# Altium PCB PCB_Ticketing_Slave_SSOP.PcbDoc
Units mm, origin at the board's own origin, x right, y up, seen from the top; angles counter-clockwise.
Board outline 80.7 x 51.5 mm, 2 copper layers (Top Layer, Bottom Layer), stack 1.586 mm thick; 49 components, 36 nets, 189 pads, 53 vias.
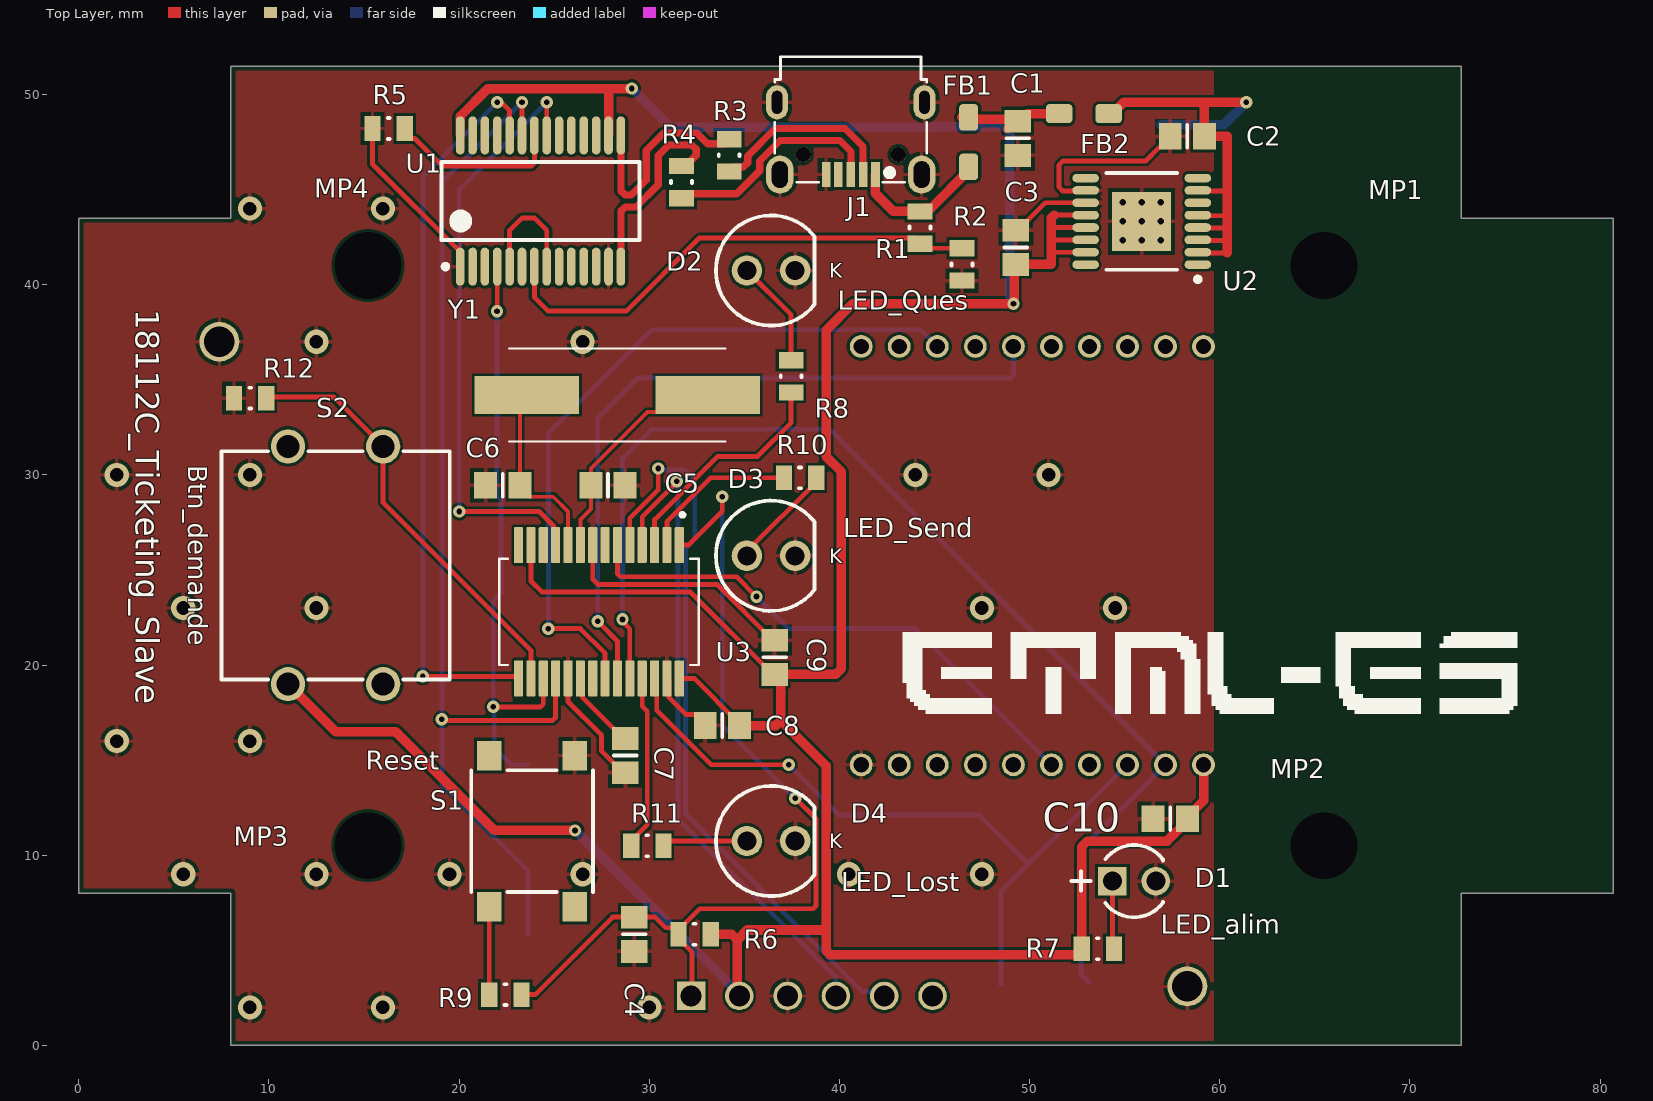
[diagram p0: Top Layer view]
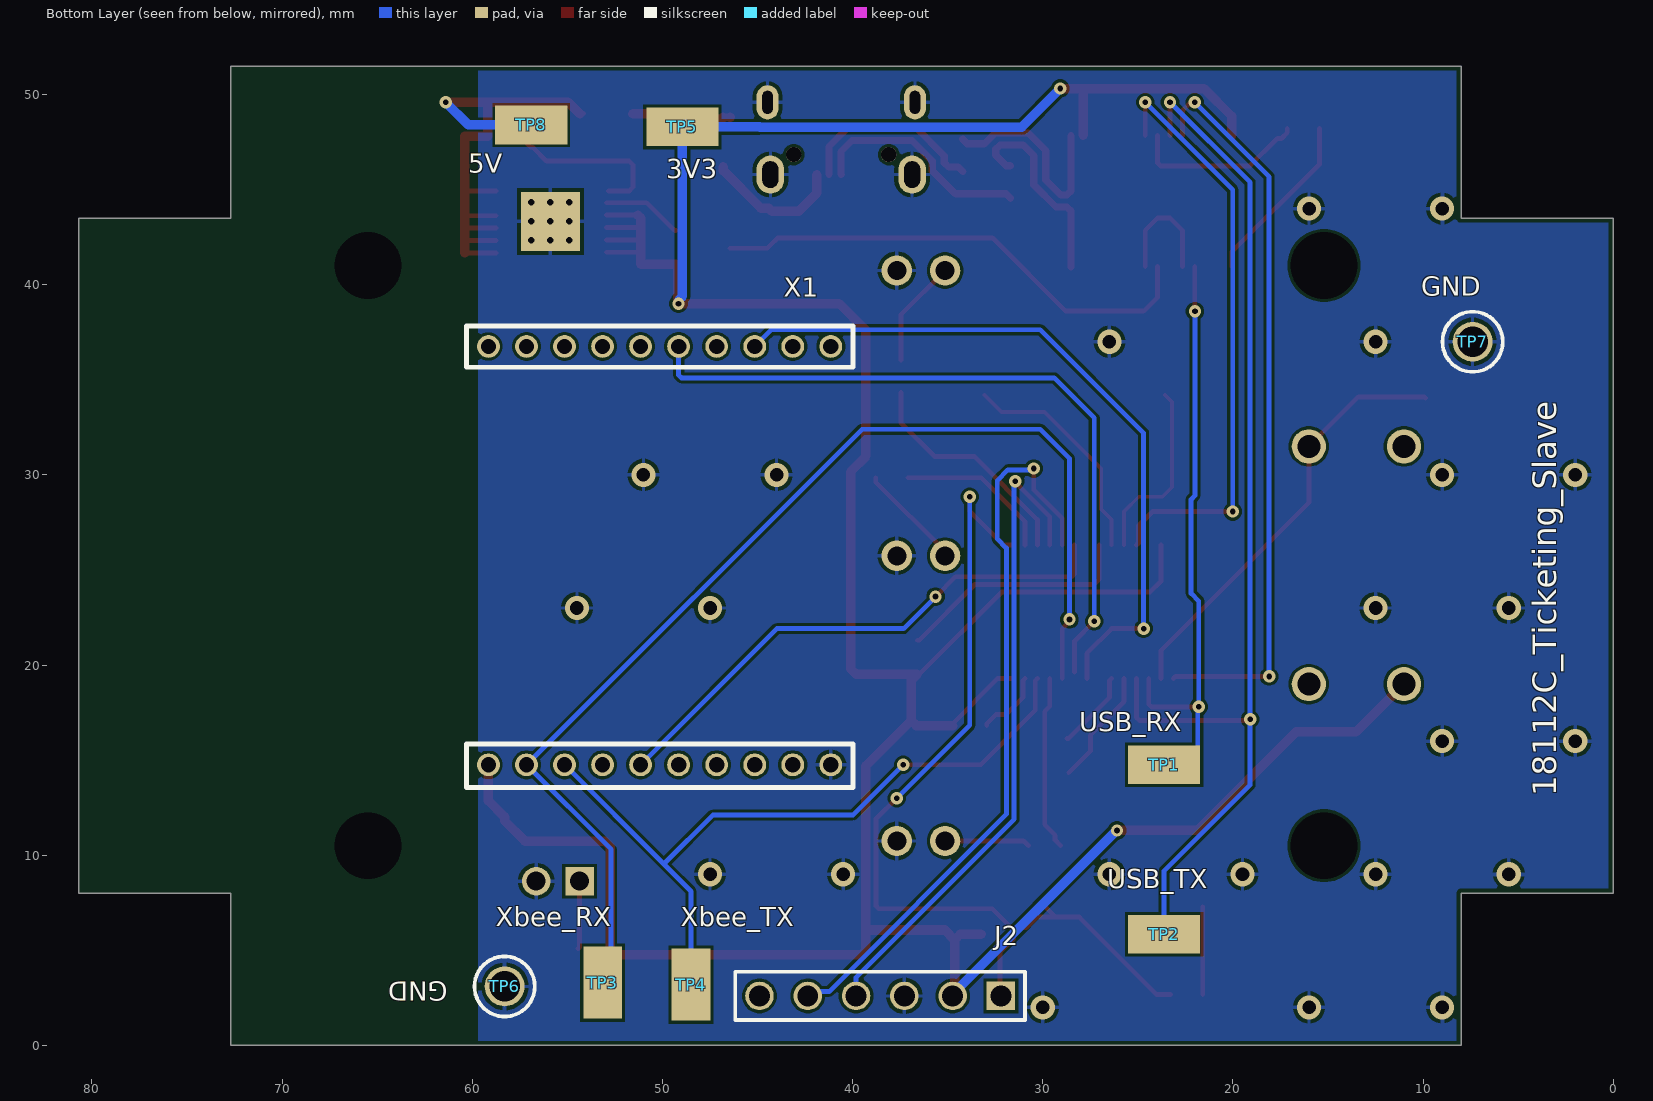
[diagram p1: Bottom Layer view, seen from below]

## Layer stack, top to bottom
Top Solder: solder mask 0.0102, Solder Resist, Dk 3.5
Top Layer: signal copper 0.018
Dielectric1: core 1.55, FR-4, Dk 4.8
Bottom Layer: signal copper 0.018
Bottom Solder: solder mask 0.0102, Solder Resist, Dk 3.5

## Board outline
0,8 0,43.5 8,43.5 8,51.5 72.7,51.5 72.7,43.5 80.7,43.5 80.7,8 72.7,8 72.7,0 8,0 8,8

## Design rules (kind name [scope] priority, off if disabled: settings)
BoardOutlineClearance [All] p1: gap=0.25 ignorepadtopadclearanceinfootprint=FALSE except(0: Arc-SplitContinuation Track-SplitContinuation SMDPad-SplitContinuation THPad-SplitContinuation Via-SplitContinuation Fill-SplitContinuation Poly-SplitContinuation Region-SplitContinuation Text-SplitContinuation)
Clearance Clearance-xPP-xTP-xTT [All] p1: gap=0.15 ignorepadtopadclearanceinfootprint=FALSE except(0: Arc-Hole Track-Hole SMDPad-Hole THPad-Hole Via-Hole Fill-Hole Poly-Hole Region-Hole Text-Hole)
ComponentClearance [All] p1: gap=0.25 collisioncheckmode=3 verticalgap=0.25 showdistances=FALSE
DiffPairsRouting [All] p1: maxlimit=0.25 minlimit=0.25 mostfreqgap=0.25 toplayer_minwidth=0.381 toplayer_maxwidth=0.381 toplayer_prefwidth=0.381 bottomlayer_minwidth=0.381 bottomlayer_maxwidth=0.381 bottomlayer_prefwidth=0.381 maxuncoupledlength=12.5
Height [All] p1: minheight=0 maxheight=25 prefheight=12.5
HoleSize HoleSize-PTH [All] p1: absolutevalues=TRUE maxlimit=10 minlimit=0.25 maxpercent=80.000 minpercent=20.000
HoleToHoleClearance [All] p1: gap=0.35 allowstackedmicrovias=TRUE
MinimumAnnularRing "Minimum IAR  >0.45mm" [((ObjectKind = 'Pad') OR (ObjectKind = 'Via')) And (Layer = 'MultiLayer') And (HoleDiameter > AsMM(0.45))] p1: minimumring=0.175 // minimum inner annular ring for pads > 0.45mm finished hole size
MinimumAnnularRing "Minimum IAR <=0.45mm" [((ObjectKind = 'Pad') OR (ObjectKind = 'Via')) And (Layer = 'MultiLayer') And (HoleDiameter <= AsMM(0.45))] p2: minimumring=0.175 // minimum inner annular ring for pads <= 0.45mm finished hole size
MinimumSolderMaskSliver [All] p1: minsoldermaskwidth=0.08
PasteMaskExpansion [All] p1: expansion=-0.025
PlaneClearance PlaneClearance-IPI [All] p1: clearance=0.25
PlaneConnect [All] p1: planeconnectstyle=Relief reliefexpansion=0.175 reliefentries=4 reliefconductorwidth=0.2 reliefairgap=0.2
PolygonConnect PolygonConnect-xTW [All] p1: connectstyle=Relief reliefconductorwidth=0.2 reliefentries=4 polygonreliefangle="90 Angle" airgapwidth=0.2
RoutingCorners [All] p1: cornerstyle=45-Degree minsetback=2.5 maxsetback=2.5
RoutingVias RoutingViasES [All] p1: holewidth=0.3 width=0.65 viastyle="Through Hole" minholewidth=0.25 minwidth=0.61 maxholewidth=0.45 maxwidth=0.8 // finishet hole size <= 0.45mm
SilkToSilkClearance [All] p1: silktosilkclearance=0.2
SilkToSolderMaskClearance SilkscreenOverComponentPads [IsPad] p1: minsilkscreentomaskgap=0.2 clearancetoexposedcopper=TRUE
SolderMaskExpansion [All] p1: expansion=0 istentingtop=FALSE
UnRoutedNet [All] p1: checkbadconnections=TRUE
Width "Width Power" [InNetClass('POWER')] p1: maxlimit=0.5 minlimit=0.254 preferedwidth=0.5
Width Width-xTW [All] p2: maxlimit=1.5 minlimit=0.15 preferedwidth=0.254
17 further rules are at their usual default settings.

## Classes and differential pairs
net class POWER: 3V3 5V GND NetC1_1 NetR1_2 NetU2_6 VBUS
component class Designator: C1 C2 C3 FB1 FB2 J1 R1 R2 R3 R4 R5 TP1 TP2 TP5 TP6 TP7 TP8 U1 U2
differential pair USB_D: +USB_D_P -USB_D_N
differential pair U_D: +U_D_P -U_D_N

## Components (designator, comment, footprint, x,y, rotation, side; value= is the part's Value field where it differs from the comment)
C1 "680nF" 6-0805_N 49.384,47.7 r270 top
C2 "10uF" 6-0805_N 58.3,47.8 r180 top
C3 "10uF" 6-0805_N 49.284,41.963 r270 top
C4 "120nF" 6-0805_N 29.21,5.842 r90 top
C5 "22pF" 6-0805_N 27.835,29.449 r180 top
C6 "22pF" 6-0805_N 22.3,29.449 r0 top
C7 "10uF" 6-0805_N 28.735,15.24 r90 top
C8 "100nF" 6-0805_N 33.845,16.82 r0 top
C9 "100nF" 6-0805_N 36.6,20.407 r270 top
C10 "100nF" 6-0805_N 57.4,11.911 r0 top
D1 "WP424IDT" LED-2P-2.28-3MM 55.499,8.636 r0 top locked
D2 "WP7113LGD" "Type 5mm" 36.41,40.746 r0 top locked
D3 "WP7113ND" "Type 5mm" 36.41,25.746 r0 top locked
D4 "WP7113LID" "Type 5mm" 36.41,10.746 r0 top locked
FB1 "600Ohm, 2A" "WE-CBF_0805_High Current" 46.8,47.5 r90 top
FB2 "600Ohm, 2A" "WE-CBF_0805_High Current" 52.859,49 r0 top
J1 "629105150521" 629105150521 40.6,48.691 r180 top locked
J2 "76384-406LF" 76384-406LF 32.2,2.6 r0 bottom
MP1 "M3" 9774010151 65.485,41.01 r0 top locked
MP2 "M3" 9774010151 65.485,10.5 r0 top locked
MP3 "M3" 9774010151 15.215,10.5 r0 top locked
MP4 "M3" 9774010151 15.215,41.01 r0 top locked
R1 "10k" RESC0805(2012)_L 44.244,43.007 r270 top
R2 "20k" RESC0805(2012)_L 46.45,41.063 r270 top
R3 "24R" RESC0805(2012)_L 34.207,46.8 r90 top
R4 "24R" RESC0805(2012)_L 31.7,45.4 r90 top
R5 "1k" RESC0805(2012)_L 16.3,48.212 r180 top
R6 "47k" RESC0805(2012)_L 32.385,5.842 r180 top
R7 "68" RESC0805(2012)_L 53.594,5.08 r180 top
R8 "750" RESC0805(2012)_L 37.465,35.179 r270 top
R9 "120" RESC0805(2012)_L 22.44,2.667 r0 top value=10k
R10 "68" RESC0805(2012)_L 37.934,29.845 r180 top value=680
R11 "820" RESC0805(2012)_L 29.903,10.5 r180 top value=680
R12 "10k" RESC0805(2012)_L 9.017,34.036 r180 top
S1 "430182050816" 430182050816 23.84,11.265 r270 top locked
S2 "430466073726" 4304x60737x6_12x12x7.3 13.51,25.246 r90 top locked
TP1 "" KSTN-5019_V 23.622,14.755 r180 bottom
TP2 "" KSTN-5019_V 23.622,5.842 r180 bottom
TP3 "" KSTN-5019_V 53.15,3.302 r270 bottom value=Xbee_RX
TP4 "" KSTN-5019_V 48.5,3.2 r270 bottom value=Xbee_TX
TP5 "" KSTN-5019_V 48.952,48.3 r0 bottom
TP6 "" KSTN-5011_V 58.3,3.1 r270 bottom
TP7 "" KSTN-5011_V 7.4,37 r0 bottom
TP8 "" KSTN-5019_V 56.9,48.4 r0 bottom
U1 "CY7C64225-28PVXC" CYP-PVX28_N 24.287,44.4 r90 top
U2 "MAX1793EUE33+" TSOP65P640X110_HS-17N 55.9,43.332 r180 top
U3 "PIC32MX130F064B-I/ML" SOP65P780X200-28N 27.357,22.8 r270 top locked
X1 "Header 2x10" ZB-SB 50.15,25.755 r90 bottom locked
Y1 "LFXTAL003151" LFXTAL003151REEL 28.321,34.2 r180 top

## Footprints (in the part's own frame and the unit in brackets; to place one, negate y for a bottom-side part, rotate by r counter-clockwise, add the part's x,y. Pads: shape width x height; smd on the part's side, far side on the other; paste and mask are expansions set on the pad)
6-0805_N [mm] "Chip Resistor, Body 2.0x1.2mm, IPC Medium Density"
  rect 1.2x1.4 smd: 1(-0.9,0) 2(0.9,0)
  silkscreen extent 0,-0.6 0,0.6, body extent -1.07,-0.7 1.07,0.7, height 0.7
4304x60737x6_12x12x7.3 [mm] "12x12mm washable Tact Switch, THT version"
  round 1.8 hole 1.2: 1(-6.25,2.5) 2(6.25,2.5) 3(-6.25,-2.5) 4(6.25,-2.5)
  silkscreen extent -6,-6 6,6, body extent -6.99,-6 6.99,6, height 7.35
76384-406LF [mm] "Connector; Header; 6 Position"
  rect 1.5x1.5 hole 1.1: 1(0,0)
  round 1.5 hole 1.1: 2(2.54,0) 3(5.08,0) 4(7.62,0) 5(10.16,0) 6(12.7,0)
  silkscreen extent -1.27,-1.27 13.97,1.27, body extent -0.72,-2.58 13.52,2.67, height 8.84
9774010151 [mm] "M2.5 Thread Internal, Length 1mm"
  round 0 hole 3.51 unplated paste-403.566: 1(0,0)
430182050816 [mm] "SMD Tact Switch, body 6x6mm"
  rect 1.55x1.3 smd: 1(-3.975,2.25) 2(-3.975,-2.25) 3(3.975,2.25) 4(3.975,-2.25)
  silkscreen extent -3.2,-3.2 3.2,3.2, body extent -4.5,-3.1 4.5,3.1, height 5.03
629105150521 [mm] "Micro USB 2.0 SMT Type B Horizontal 5 Contacts High Current"
  rect 0.45x1.3 smd: 1(-1.3,2.9) 2(-0.65,2.9) 3(0,2.9) 4(0.65,2.9) 5(1.3,2.9)
  oval 1.15x1.8 hole 0.55 slot 1.2 at 90 deg: Shell(-3.875,-0.9) Shell(3.875,-0.9)
  oval 1.45x2 hole 0.85 slot 1.4 at 90 deg: Shell(-3.725,2.9) Shell(3.725,2.9)
  round 0.8 hole 0.8 unplated: ""(-2.5,1.85) ""(2.5,1.85)
  silkscreen extent -4,-3.3 4,3.3, body extent -4,-3.3 4,3.3, height 2.71
CYP-PVX28_N [mm] "SOP, 28-Leads, Body 10.2x5.3mm, Pitch 0.65mm, IPC Medium Density"
  oval 2x0.45 smd: 1(-3.45,4.225) 2(-3.45,3.575) 3(-3.45,2.925) 4(-3.45,2.275) 5(-3.45,1.625) 6(-3.45,0.975) 7(-3.45,0.325) 8(-3.45,-0.325) 9(-3.45,-0.975) 10(-3.45,-1.625) 11(-3.45,-2.275) 12(-3.45,-2.925) 13(-3.45,-3.575) 14(-3.45,-4.225) 15(3.45,-4.225) 16(3.45,-3.575) 17(3.45,-2.925) 18(3.45,-2.275) 19(3.45,-1.625) 20(3.45,-0.975) 21(3.45,-0.325) 22(3.45,0.325) 23(3.45,0.975) 24(3.45,1.625) 25(3.45,2.275) 26(3.45,2.925) 27(3.45,3.575) 28(3.45,4.225)
  silkscreen extent -3.57,-5.2 2.05,5.2, body extent -3,-4.95 3,4.95, height 1.75
KSTN-5011_V [mm] "Test Point, Dia 3.17mm"
  round 2.1 hole 1.6: 1(0,0)
  silkscreen extent -1.58,-1.59 1.58,1.59, body extent -1.59,-1.59 1.59,1.59, height 8.13
KSTN-5019_V [mm] "Test Point, 1-Leads, Body 3.81x2.03mm"
  rect 3.8x2.03 smd: 1(0,0)
  body extent -1.91,-1.02 1.9,1.02, height 2.29
LED-2P-2.28-3MM [mm] "LED, 2-Leads, Dia 3mm, Pitch 2.28mm"
  rect 1.5x1.5 hole 1: 1(-1.14,0)
  round 1.5 hole 1: 2(1.14,0)
  silkscreen extent -3.29,-1.9 1.52,1.9, body extent -1.9,-1.91 1.52,1.91, height 5.3
LFXTAL003151REEL [mm]
  rect 5.5x2 smd: 1(-4.75,0) 2(4.75,0)
  silkscreen extent -5.7,-2.45 5.7,2.45, body extent -5.81,-2.35 5.8,2.35, height 4.2
RESC0805(2012)_L [mm] "Chip Resistor, Body 2.0x1.3mm, IPC High Density"
  rect 0.85x1.3 smd: 1(-0.85,0) 2(0.85,0)
  silkscreen extent -0.05,-0.55 0.05,0.55, body extent -1.1,-0.67 1.1,0.68, height 0.7
SOP65P780X200-28N [mm]
  rrect25% 1.9x0.48 smd: 1(-3.505,4.225) 2(-3.505,3.575) 3(-3.505,2.925) 4(-3.505,2.275) 5(-3.505,1.625) 6(-3.505,0.975) 7(-3.505,0.325) 8(-3.505,-0.325) 9(-3.505,-0.975) 10(-3.505,-1.625) 11(-3.505,-2.275) 12(-3.505,-2.925) 13(-3.505,-3.575) 14(-3.505,-4.225) 15(3.505,-4.225) 16(3.505,-3.575) 17(3.505,-2.925) 18(3.505,-2.275) 19(3.505,-1.625) 20(3.505,-0.975) 21(3.505,-0.325) 22(3.505,0.325) 23(3.505,0.975) 24(3.505,1.625) 25(3.505,2.275) 26(3.505,2.925) 27(3.505,3.575) 28(3.505,4.225)
  silkscreen extent -5.19,-5.25 2.8,5.25
TSOP65P640X110_HS-17N [mm] "TSOP, 16-Leads, Body 5.00x4.40mm, Pitch 0.65mm, Thermal Pad 3.10x3.10mm, IPC Medium Density"
  oval 1.4x0.45 smd: 1(-2.95,2.275) 2(-2.95,1.625) 3(-2.95,0.975) 4(-2.95,0.325) 5(-2.95,-0.325) 6(-2.95,-0.975) 7(-2.95,-1.625) 8(-2.95,-2.275) 9(2.95,-2.275) 10(2.95,-1.625) 11(2.95,-0.975) 12(2.95,-0.325) 13(2.95,0.325) 14(2.95,0.975) 15(2.95,1.625) 16(2.95,2.275)
  rect 3.1x3.1 smd far side: 17(0,0)
  rect 3.1x3.1 smd: 17(0,0)
  silkscreen extent -3.08,-2.55 1.85,3.17, body extent -3.19,-2.55 3.19,2.55, height 1.1
"Type 5mm" [mm] "THT, LED-5mm, 2pin- Body 5.8mm"
  round 1.6 hole 1: 1(1.27,0) 2(-1.27,0)
  silkscreen extent -2.9,-2.9 2.29,2.9, body extent -2.9,-2.9 2.5,2.9, height 11.7
"WE-CBF_0805_High Current" [mm]
  rrect40% 1.4x1 smd: 1(-1.3,0) 2(1.3,0)
  body extent -1,-0.6 1,0.6, height 0.9
ZB-SB [mm] "Header"
  round 1.2 hole 0.8: 1(-11,9) 2(-11,7) 3(-11,5) 4(-11,3) 5(-11,1) 6(-11,-1) 7(-11,-3) 8(-11,-5) 9(-11,-7) 10(-11,-9) 11(11,9) 12(11,7) 13(11,5) 14(11,3) 15(11,1) 16(11,-1) 17(11,-3) 18(11,-5) 19(11,-7) 20(11,-9)
  silkscreen extent -12.19,-10.16 12.06,10.16, body extent -12.55,-10.34 12.45,30.66, height 7.5

## Part data
C1: library part 885012207098, "WCAP-CSGP General Purpose Ceramic Capacitors, size 0805, 100nF, +/-10%, 50VDC", Supplier Part Number=732-7663-1-ND, Capacitance=680nF, Supplier=Digi-Key, Supplier Part Number 1=732-7663-1-ND, Supplier unit price=0.13, Technical Reference=X7R0805104K050DFCT10000
C2 C3 C7: library part Cap, "Capacitor", Supplier Part Number=1276-1298-1-ND, Supplier=Digi-Key, Supplier unit price=0.1
  C2 C3: Capacitance=10uF, LatestRevisionDate=17-Jul-2002, LatestRevisionNote="Re-released for DXP Platform.", PackageDescription="Radial Cap, Thru-Hole; 2 Leads; 0.3 in Pin Spacing", PackageReference=RAD-0.3, Published=8-Jun-2000, Publisher="Altium Limited"
C4: library part Cap, "Capacitor", Supplier Part Number=311-4323-1-ND, Supplier=Digi-Key, Supplier unit price=0.18
C5 C6: library part CMP-2007-03167-1, "VJ0805Y104KNAAT", Supplier Part Number=399-C0805C220J5GAC7800CT-ND, Supplier=Digi-Key, Supplier unit price=0.1
C8 C9 C10: library part Cap, "Capacitor", Supplier Part Number=399-C0805C104M5RAC7800CT-ND, Supplier=Digi-Key, Supplier unit price=0.1
D1: library part LED, "LED", Color=Red, Supplier Part Number=754-1305-ND, Supplier=Digi-Key, Supplier unit price=0.4
D2: library part LED, "LED", Color=Green, Supplier Part Number=754-1265-ND, Supplier=Digi-Key, Supplier unit price=0.33
D3: library part LED, "LED", Color=Orange, Supplier Part Number=754-1896-ND, Supplier=Digi-Key, Supplier unit price=0.3
D4: library part LED, "LED", Color=Red, Supplier Part Number=754-1266-ND, Supplier=Digi-Key, Supplier unit price=0.33
FB1 FB2: library part 742792040, "WE-CBF SMT EMI Suppression Ferrite Bead, size 0805, 600Ohm, 2A", DC Resistance max.=0.15Ohm, Operating Temperature="-55 to +125degC", Rated Current=2A, Supplier Part Number=732-1620-1-ND, ComponentLink1Description=Manufacturer, ComponentLink1URL=http://www.we-online.de, ComponentLink2Description=Datasheet, ComponentLink2URL=https://katalog.we-online.com/pbs/datasheet/742792040.pdf, Impedance max.=700Ohm, Impedance@100 MHz=600Ohm, Mounting Technology=SMT, Packaging="Tape and Reel", Part Number=742792040, Published Date="March 2019", Publisher="Wurth Elektronik", Size=0805, Supplier=Digi-Key, Supplier Part Number 1=732-1620-1-ND, Supplier unit price=0.22, Type="High Current"
J1: "Micro USB 2.0 SMT Type B Horizontal 5 Contacts High Current WR-COM", Part Number=732-5960-1-ND, ComponentLink1Description=Manufacturer, ComponentLink1URL=http://www.we-online.de, ComponentLink2Description=Datasheet, ComponentLink2URL=http://katalog.we-online.de/em/datasheet/629105150521.pdf, Construction=SMT, Gender=Receptacle, Interface Type="Type B", Published Date="April 2017", Publisher="Wurth Elektronik", Sub-Family="Micro USB 2.0", Supplier=Digi-key, Supplier Part Number=732-5960-1-ND, Supplier unit price=2.12, Type=Horizontal
J2: library part "Header 6", "Header, 6-Pin", Supplier Part Number 1=609-1321-ND, LatestRevisionDate=17-Jul-2002, LatestRevisionNote="Re-released for DXP Platform.", Publisher="Altium Limited", Supplier 1=Digi-Key, Supplier unit price=0.66
MP1 MP2 MP3 MP4: library part 9774010151, "WA-SMSI SMT Steel Spacer, M2.5 Thread Internal, Length 1mm", Supplier=Digi-Key
R1: library part CMP-1013-00122-1, "100K 0.125W 5% 0805 (2012 Metric)  SMD", Case-EIA=0805, Case-Metric=2012, Power="0.125 W", Supplier Part Number=311-10KLGCT-ND, Tolerance="5 %", Supplier=Digi-Key, Supplier unit price=0.1, Technology=SMT
R2: library part CMP-1013-00122-1, "100K 0.125W 5% 0805 (2012 Metric)  SMD", Case-EIA=0805, Case-Metric=2012, Power="0.125 W", Supplier Part Number=RNCP0805FTD20K0CT-ND, Tolerance="5 %", Supplier=Digi-Key, Supplier unit price=0.1, Technology=SMT
R3 R4: library part CMP-1013-00122-1, "100K 0.125W 5% 0805 (2012 Metric)  SMD", Case-EIA=0805, Case-Metric=2012, Power="0.125 W", Supplier Part Number=311-24.0CRCT-ND, Tolerance="5 %", Supplier=Digi-Key, Supplier unit price=0.1, Technology=SMT
R5: library part CMP-1013-00122-1, "100K 0.125W 5% 0805 (2012 Metric)  SMD", Case-EIA=0805, Case-Metric=2012, Power="0.125 W", Supplier Part Number=RNCP0805FTD1K00CT-ND, Tolerance="5 %", Supplier=Digi-Key, Supplier unit price=0.1, Technology=SMT
R6: library part CMP-1013-00122-1, "100K 0.125W 5% 0805 (2012 Metric)  SMD", Supplier Part Number=A130144CT-ND, Supplier=Digi-Key, Supplier unit price=0.1
R7 R10: library part CMP-1013-00122-1, "100K 0.125W 5% 0805 (2012 Metric)  SMD", Supplier Part Number=RMCF0805JT68R0CT-ND, Supplier=Digi-Key, Supplier unit price=0.1
R8: library part CMP-1013-00122-1, "100K 0.125W 5% 0805 (2012 Metric)  SMD", Supplier Part Number=A126386CT-ND, Supplier=Digi-Key, Supplier unit price=0.1
R9: library part CMP-1013-00122-1, "100K 0.125W 5% 0805 (2012 Metric)  SMD", Supplier Part Number=A129738CT-ND, Supplier=Digi-Key, Supplier unit price=0.1
R11: library part CMP-1013-00122-1, "100K 0.125W 5% 0805 (2012 Metric)  SMD", Supplier Part Number=A129748CT-ND, Supplier=Digi-Key, Supplier unit price=0.1
R12: library part CMP-1013-00122-1, "100K 0.125W 5% 0805 (2012 Metric)  SMD", Supplier Part Number=311-10KLGCT-ND, Supplier=Digi-Key, Supplier unit price=0.1
S1: "6x6mm SMD Tact Switch WS-TASV, height 5 mm, 160 gf", Supplier Part Number=732-7005-1-ND, Supplier=Digi-Key, Supplier unit price=0.51
S2: "WS-TATV 12x12mm washable Tact Switch, THT version", Supplier Part Number=430466073726-ND, Supplier=Digi-Key, Supplier unit price=0.56
TP1 TP2 TP5 TP8: library part CMP-1672-00008-1, "Test Point, 1 Position SMD, RoHS, Tape and Reel", Package Quantity=1000, Supplier Part Number=36-5019CT-ND, ComponentLink1Description="Manufacturer URL", ComponentLink1URL=http://www.keyelco.com/, ComponentLink2Description=Datasheet, ComponentLink2URL=http://www.keyelco.com/product-pdf.cfm?p=1357, Contact Plating=Silver, DatasheetVersion=03/2014, Mount="Surface Mount", Mounting Technology="Surface Mount", PackageDescription="1-Pin Surface Mount Device, Body 3.81 x 2.03 mm", PackageReference=5019, Packaging="Tape and Reel", Pins=1, RoHSCompliant=True, Supplier=Digi-Key, Supplier unit price=0.33
TP3 TP4: library part CMP-1672-00008-1, "Test Point, 1 Position SMD, RoHS, Tape and Reel", Supplier Part Number=36-5019CT-ND, Supplier=Digi-Key, Supplier unit price=0.33
TP6 TP7: library part CMP-1672-00003-4, "Test Point, Black, Through Hole, RoHS, Bulk,5011", Colour=Black, Manufacturer=Keystone, Package Quantity=100, ComponentLink1Description="Manufacturer URL", ComponentLink1URL=http://www.keyelco.com/, ComponentLink2Description=Datasheet, ComponentLink2URL=http://www.keyelco.com/product-pdf.cfm?p=1320, Contact Material=Bronze, Contact Plating=Silver, DatasheetVersion="Rev. F, 12/2013", Height="8.12 mm", Mount="Through Hole", Mounting Technology="Through Hole", PackageDescription="1-Pin Through Hole Device, Dia 3.17 mm", PackageReference=5011, Packaging=Bulk, Pins=1, REACH SVHC="No SVHC", RoHSCompliant=true
U1: library part CMP-0967-00143-1, "USB-to-UART Bridge Controller, 3 to 5.25 V, 0 to 70 degC, 28-Pin SSOP (PVX28), Tube", Manufacturer=Cypress, Max. Operating Temp. (degreesC)=70, Max. Operating Voltage (V)=5.25, Min. Operating Temp. (degreesC)=0, Min. Operating Voltage (V)=3, Part Number=428-3158-ND, ComponentLink1Description="Manufacturer URL", ComponentLink1URL=http://www.cypress.com/, ComponentLink2Description=Datasheet, ComponentLink2URL=http://www.cypress.com/?docID=48153, ComponentLink3Description="Package Specification", ComponentLink3URL=http://www.cypress.com/?docID=1371, DatasheetVersion="Rev. *D", Manufacturer Part Number=CY7C64225-28PVXC, Memory Architecture=Flash, Mounting Technology="Surface Mount", PackageDescription="28-Pin Super Small Outline Package, Body 10.2 x 5.3 mm, Pitch 0.65 mm", PackageReference=PVX28, PackageVersion="Rev. *C, 10/2001", Packing=Tube, PartNumber=CY7C64225-28PVXC, RoHS=Pb-Free, Supplier=Digi-key, Supplier Part Number=428-3158-ND, Supplier unit price=3.83
U2: library part MAX1793, Supplier Part Number=MAX1793EUE33+-ND, Supplier=Digi-Key, Supplier unit price=3.92
U3: library part CMP-0048-00437-1, "32-bit Microcontroller with Audio and Graphics Interface, USB and Advanced Analog, 40 MHz, 21 I/O, PMP, -40 to 85 degC, 28-pin QFN (ML28), Tube", Supplier=Digi-Key, Supplier Part Number=PIC32MX130F064B-I/ML, Supplier unit price=3.61
X1: library part "HDR ZB-SB 2x10_1", "Header 2x10 / Xbee de letml(1623) ou xbee XB24CAUIT-001", Supplier=Digi-Key
Y1: library part LFXTAL003151REEL, "Crystal or Oscillator", Frequency=8MHz, Supplier Part Number=9713794, Supplier=Farnell, Supplier unit price=0.392

## Via types
v1: diameter 1.27, hole 0.711, Top Layer to Bottom Layer, tented both sides, 23 vias
v2: diameter 0.65, hole 0.3, Top Layer to Bottom Layer, tented both sides, 20 vias
v3: diameter 0.75, hole 0.35, Top Layer to Bottom Layer, 9 vias
v4: diameter 0.65, hole 0.3, Top Layer to Bottom Layer, 1 vias

## Nets (pads, with @x,y where several pads share a name; then routed paths per layer and width w, separated by ;. In a path a pad name is that pad's centre, name@x,y a point inside that pad or via, vN(x,y) a via of type N, cw(c..) or ccw(c..) an arc to the next point about the centre after c; other vN are vias at no path point)
3V3: C3.2 C8.2 C9.2 C10.2 J2.2 R6.1 R7.2 S2.1 TP5.1 U1.16 U1.28 U2.12 U2.13 U2.14 U2.15 U3.13 U3.28 X1.1 | length 196.4
  Top Layer w0.254: U3.13 23.782,24.42 24.368,23.835 32.172,23.835 36.5,19.507 C9.2 ; U3.28 32.37,19.295 34.745,16.92 C8.2 ; 51.145,41.063 51.15,41.068 ; 51.15,41.707 U2.15 ; 51.15,42.357 U2.14 ; 51.15,42.933 51.224,43.007 U2.13 ; 51.299,43.657 U2.12
  Top Layer w0.5: S2.1 13.506,16.5 16.668,16.5 21.868,11.3 v2(26.1,11.3) ; U1.28 20.062,48.859 21.519,50.316 27.871,50.316 ; U1.16 27.862,50.3 ; 27.887,50.3 27.871,50.316 ; v2(29.084,50.316) 27.871,50.316 ; R6.1 34.342,5.842 34.635,5.549 ; C8.2 36.645,16.82 36.916,17.091 ; J2.2@34.798,2.667 34.635,2.83 34.635,5.549 ; 51.145,41.063 C3.2 49.187,40.967 49.187,39.029 v2(49.159,39) 40.7,39 39.3,37.6 39.3,30.97 40.1,30.17 40.1,19.8 39.807,19.507 C9.2 36.916,19.191 36.916,17.091 ; 51.15,41.068 51.15,41.707 51.15,42.357 51.15,42.933 51.15,43.508 51.299,43.657 ; X1.1 59.15,12.861 58.3,12.011 C10.2 58.3,11.811 57.235,10.746 53.037,10.746 52.744,10.453 52.744,4.951 52.569,4.776 39.5,4.776 39.3,4.976 39.3,6.067 ; 34.635,5.549 35.153,6.067 39.3,6.067 ; 36.916,17.091 39.3,14.707 39.3,6.067
  Bottom Layer w0.5: v2(26.1,11.3) 26.132,11.3 34.765,2.667 J2.2@34.798,2.667 ; v2(29.084,50.316) 31.109,48.291 44.879,48.291 44.888,48.3 TP5.1 48.952,39.389 49.13,39.21 49.13,39.029 v2(49.159,39)
5V: C2.1 FB2.2 TP8.1 U2.2 U2.3 U2.4 U2.5 U2.7 | length 29.9
  Top Layer w0.254: FB2.2 FB2.2@54.359,49 ; U2.2@58.75,41.675 60.405,41.675 ; U2.3@58.75,42.325 60.405,42.325 ; U2.4@58.75,42.975 60.405,42.975 ; U2.5@58.75,43.625 60.405,43.625 ; U2.7@58.75,44.925 60.4,44.925 ; 60.4,44.39 60.405,44.385
  Top Layer w0.5: FB2.2@54.359,49 54.95,49.591 59.2,49.591 ; 60.4,44.39 60.4,44.925 60.4,47.8 C2.1 59.2,49.591 ; 60.405,41.675 60.405,42.325 60.405,42.975 60.405,43.625 60.405,44.385 ; v2(61.4,49.591) 59.2,49.591
  Bottom Layer w0.5: TP8.1 60.209,48.4 v2(61.4,49.591)
Connect(M): U3.22 X1.18 | length 38.2
  Top Layer w0.254: v2(24.7,21.916) 26.384,21.916 27.682,20.618 U3.22
  Bottom Layer w0.254: v2(24.7,21.916) 24.7,32.2 30.132,37.632 44.273,37.632 X1.18
GND: C1.2 C2.2 C3.1 C4.1 C5.1 C6.1 C7.1 C8.1 C9.1 C10.1 D1.2 D2.1 D3.1 D4.1 J1.5 J1.Shell J2.3 R2.2 R5.2 R12.2 S1.1 TP6.1 TP7.1 U1.1 U1.13 U2.10 U2.11 U2.17 U3.8 U3.19 U3.27 X1.10 | length 45
  Top Layer w0.254: R5.2 15.45,46.337 20.062,41.725 U1.1 ; U3.19 25.732,18.068 27.5,16.3 27.5,15.475 C7.1@28.635,14.34 ; U3.8 27.032,24.5 27.293,24.239 33.568,24.239 36.5,21.307 C9.1 ; U3.27 31.045,19.182 31.045,18.285 31.938,17.393 32.472,17.393 32.945,16.92 C8.1 ; C3.1@49.311,42.837 C3.1 49.384,42.863 50.828,44.307 U2.11 ; U2.10@52.85,44.925 51.756,44.925 51.554,45.127 51.554,46.3 51.754,46.5 56.1,46.5 56.827,47.227 56.927,47.227 57.4,47.7 C2.2
  other v1: 9,2 16,2 30,2 5.5,9 12.5,9 19.5,9 26.5,9 40.5,9 47.5,9 2,16 9,16 5.5,23 12.5,23 47.5,23 54.5,23 2,30 9,30 44,30 51,30 12.5,37 26.5,37 9,44 16,44
  other v3: 54.9,42.332 55.9,42.332 56.9,42.332 54.9,43.332 55.9,43.332 56.9,43.332 54.9,44.332 55.9,44.332 56.9,44.332
LED_Lost: R11.2 U3.25 | length 9.3
  Top Layer w0.254: R11.2 29.351,10.798 29.351,11.051 29.9,11.6 29.9,17.568 29.632,17.836 U3.25
LED_Ques: R8.2 U3.3 | length 12.2
  Top Layer w0.254: U3.3 30.282,27.645 33.607,30.97 35.695,30.97 37.465,32.74 R8.2
LED_Send: R10.2 U3.2 | length 8.3
  Top Layer w0.254: U3.2 30.932,27.539 33.238,29.845 R10.2
LINK(M): U3.23 X1.16 | length 38.1
  Top Layer w0.254: v2(27.3,22.296) 28.332,21.264 U3.23@28.332,19.629
  Bottom Layer w0.254: v2(27.3,22.296) 27.3,33 29.4,35.1 49.001,35.1 49.15,35.249 X1.16
NetC1_1: C1.1 FB1.2 FB2.1 | length 5.6
  Top Layer w0.5: FB1.2 46.9,48.7 49.284,48.7 C1.1 49.484,48.6 49.884,49 FB2.1 ; C1.1@48.859,48.191 49.159,48.491 C1.1@49.159,48.691
NetC5_2: C5.2 U3.9 Y1.1 | length 12
  Top Layer w0.2: U3.9 26.382,27.656 26.935,28.209 C5.2 26.935,30.332 29.903,33.3 32.171,33.3 Y1.1
NetC6_2: C6.2 U3.10 Y1.2 | length 9.8
  Top Layer w0.2: Y1.2 23.2,33.829 C6.2 23.2,29.349 23.7,28.849 24.957,28.849 25.732,28.074 U3.10
NetC7_2: C7.2 U3.20 | length 4.2
  Top Layer w0.254: U3.20 26.495,19.182 26.495,18.28 28.635,16.14 C7.2
NetD1_1: D1.1 R7.1 | length 3.6
  Top Layer w0.254: D1.1 54.359,5.165 R7.1
NetD2_2: D2.2 R8.1 | length 5.7
  Top Layer w0.254: D2.2 37.465,38.421 R8.1
NetD3_2: D3.2 R10.1 | length 5.6
  Top Layer w0.254: D3.2 35.14,25.976 38.784,29.62 R10.1
NetD4_2: D4.2 R11.1 | length 4.5
  Top Layer w0.254: R11.1 30.999,10.746 D4.2
NetR1_2: R1.2 R2.1 U1.7 | length 26.2
  Top Layer w0.254: U1.7 23.962,39.35 24.7,38.612 28.798,38.612 32.641,42.455 43.946,42.455 R1.2 44.487,41.913 R2.1
NetR5_1: R5.1 U1.22 | length 9.3
  Top Layer w0.254: R5.1 17.15,47.987 17.448,47.689 17.673,47.689 19.112,46.25 23.813,46.25 23.962,46.399 U1.22
NetR9_1: R9.1 S1.4 | length 4.6
  Top Layer w0.254: R9.1 S1.4
NetR12_1: R12.1 S2.4 U3.16 | length 22.7
  Top Layer w0.254: R12.1 9.931,34.1 13.406,34.1 S2.4 16.01,28.541 23.782,20.769 U3.16
NetU1_5: U1.5 U1.8 | length 6.3
  Top Layer w0.254: U1.5 22.662,42.862 23.3,43.5 23.975,43.5 24.612,42.863 U1.8
PGEC1: J2.5 U3.5 | length 39
  Top Layer w0.254: U3.5 28.982,27.718 30.476,29.212 v2(30.476,30.332)
  Bottom Layer w0.254: v2(30.476,30.332) 30.543,30.265 31.835,30.265 32.4,29.7 32.4,26.633 31.917,26.15 31.917,12.151 41.237,2.831 42.254,2.831 J2.5@42.418,2.667
PGED1: J2.4 U3.4 | length 34.6
  Top Layer w0.254: U3.4 29.632,27.797 31.448,29.613 v2(31.448,29.663)
  Bottom Layer w0.254: v2(31.448,29.663) 31.513,29.598 31.513,11.89 39.82,3.583 J2.4
Reset: U3.6 X1.5 | length 28.5
  Top Layer w0.254: U3.6 28.332,24.792 28.481,24.643 34.597,24.643 v4(35.64,23.6)
  Bottom Layer w0.254: v4(35.64,23.6) 37.324,21.916 43.989,21.916 X1.5
Reset_uc: C4.2 J2.1 R6.2 R9.2 U3.1 | length 49.8
  Top Layer w0.254: R9.2 24.003,2.667 28.078,6.742 C4.2@29.31,6.742 ; C4.2@29.783,7.215 C4.2@29.31,6.742 ; U3.1 32.061,26.305 33.845,28.089 v2(33.845,28.849) ; J2.1@32.258,2.667 32.258,4.894 31.535,5.617 R6.2 ; v2(37.68,13) 38.773,11.907 38.773,7.336 38.624,7.188 32.656,7.188 31.833,6.365 31.535,6.067 31.535,5.953 R6.2 ; C4.2@29.31,6.742 30.319,6.742 30.878,6.184 31.237,6.184 31.468,5.953 31.468,5.909 R6.2
  Bottom Layer w0.254: v2(33.845,28.849) 33.845,16.835 v2(37.68,13)
U_D_N: J1.2 R3.1 | length 10.1
  Top Layer w0.381: R3.1 34.442,46.184 34.955,46.184 35.179,46.408 35.179,46.769 36.622,48.212 40.295,48.212 41.24,47.267 41.24,45.801 J1.2
U_D_P: J1.3 R4.1 | length 11.9
  Top Layer w0.381: R4.1 31.935,44.785 34.598,44.785 35.81,45.996 35.81,46.507 36.884,47.581 40.034,47.581 40.609,47.006 40.609,45.8 J1.3
USB_CTS: U1.24 U3.15 | length 39
  Top Layer w0.254: v2(18.1,19.402) 23.026,19.402 U3.15 ; v2(22.012,49.591) 22.216,49.591 22.662,49.145 U1.24
  Bottom Layer w0.254: v2(18.1,19.402) 18.1,45.679 v2(22.012,49.591)
USB_D_N: R3.2 U1.15 | length 11.3
  Top Layer w0.381: U1.15 28.512,44.939 28.735,44.715 29.051,44.715 29.847,45.512 29.847,47.062 30.757,47.971 32.515,47.971 33.07,47.415 33.972,47.415 R3.2
USB_D_P: R4.2 U1.14 | length 10.6
  Top Layer w0.381: U1.14 28.512,43.861 28.735,44.084 29.312,44.084 30.478,45.251 30.478,46.8 31.019,47.34 32.253,47.34 32.476,47.117 32.476,46.801 31.925,46.25 R4.2
USB_RTS: U1.21 U3.11 | length 31.5
  Top Layer w0.254: v2(20.013,28.074) 24.21,28.074 24.969,27.315 24.969,26.418 U3.11 ; U1.21 v2(24.612,49.591)
  Bottom Layer w0.254: v2(20.013,28.074) 20.013,44.992 v2(24.612,49.591)
USB_RX: TP1.1 U1.4 U3.17 | length 31.8
  Top Layer w0.254: v2(21.8,17.8) 24.284,17.8 24.432,17.949 U3.17 ; v2(22,38.6) 22.012,38.612 U1.4
  Bottom Layer w0.254: v2(22,38.6) 22,28.905 22.2,28.705 22.2,23.765 21.8,23.365 v2(21.8,17.8) 21.849,17.751 21.849,15.643 22.737,14.755 TP1.1
USB_TX: TP2.1 U1.23 U3.18 | length 57.2
  Top Layer w0.254: v2(19.1,17.143) 19.152,17.091 24.934,17.091 25.082,17.24 U3.18 ; U1.23 v2(23.312,49.591)
  Bottom Layer w0.254: v2(23.312,49.591) 19.1,45.379 v2(19.1,17.143) 19.1,13.7 23.622,9.178 TP2.1
VBUS: FB1.1 J1.1 R1.1 | length 7.4
  Top Layer w0.5: J1.1 41.9,44.8 42.843,43.857 R1.1 44.419,44.032 44.832,44.032 46.8,46 FB1.1
Xbee_RX: TP3.1 U3.24 X1.2 | length 61.7
  Top Layer w0.254: v2(28.6,22.4) 28.6,22.293 28.982,21.911 U3.24
  Bottom Layer w0.254: v2(28.6,22.4) 28.6,30.868 30.132,32.4 39.505,32.4 X1.2 52.7,10.305 52.7,3.752 TP3.1
Xbee_TX: TP4.1 U3.26 X1.3 | length 38.9
  Top Layer w0.254: U3.26 30.395,19.182 30.395,17.618 33.258,14.755 v2(37.338,14.755)
  Bottom Layer w0.254: v2(37.338,14.755) 39.985,12.108 47.359,12.108 49.931,9.536 ; TP4.1 48.5,8.105 49.931,9.536 ; X1.3 49.931,9.536
pads on no net: J1. J1.4 J2.6 MP1.1 MP2.1 MP3.1 MP4.1 S1.2 S1.3 S2.2 S2.3 U1.2 U1.3 U1.6 U1.9 U1.10 U1.11 U1.12 U1.17 U1.18 U1.19 U1.20 U1.25 U1.26 U1.27 U2.1 U2.6 U2.8 U2.9 U2.16 U3.7 U3.12 U3.14 U3.21 X1.4 X1.6 X1.7 X1.8 X1.9 X1.11 X1.12 X1.13 X1.14 X1.15 X1.17 X1.19 X1.20

## Polygon pours and split planes (outlines as drawn)
GND on Top Layer "GND_L01_P000" (solid, remove dead copper, pour order 0): 8,8 8,0 59.69,0 59.69,51.5 8,51.5 8,43.5 0,43.5 0,8
GND on Bottom Layer "GND_L02_P001" (solid, remove dead copper, pour order 1): 59.69,51.5 59.69,0 8,0 8,8 0,8 0,43.5 8,43.5 8,51.5

## Silkscreen, mask and mechanical layers (free items; w line width, h text height)
Top Overlay:
  drawing of 12 lines, arcs and shapes, not listed
  text "18112C_Ticketing_Slave" at 3,38.7 h1.25 r270
  text "LED_Ques" at 39.91,38.688 h1
  text "Btn_demande" at 5.767,30.5 h1 r270
  text "LED_Send" at 40.2,26.72 h1
  text "Reset" at 15.1,14.5 h1
  text "LED_Lost" at 40.1,8.1 h1
  text "LED_alim" at 56.9,5.867 h1
Bottom Overlay:
  text "5V" at 60.21,45.891 h1
  text "3V3" at 49.8,45.6 h1
  text "GND" at 10.1,39.422 h1
  text "USB_RX" at 28.094,16.523 h1
  text "18112C_Ticketing_Slave" at 3,13.1 h1.25 r270
  text "USB_TX" at 26.6,8.267 h1
  text "Xbee_TX" at 49.05,6.267 h1
  text "Xbee_RX" at 58.761,6.267 h1
  text "GND" at 61.3,3.339 h1 r180
Board Outline (ES):
  the board outline again, w0.254

## Dimensions
0,43.5 to 80.7,43.5 on Top Dims
8,51.5 to 72.7,51.5 on Top Dims
0,43.5 to 8,51.9 on Top Dims
72.7,51.5 to 72.7,0 on Top Dims
80.7,43.5 to 80.7,8 on Top Dims
80.7,8 to 72.7,0 on Top Dims

## Text inside footprints (layer, text, board x,y; h text height)
D2: Top Overlay "K" at 39.458,40.365 h0.76; Components Courtyards "K" at 39.458,40.365 h0.76
D3: Top Overlay "K" at 39.458,25.365 h0.76; Components Courtyards "K" at 39.458,25.365 h0.76
D4: Top Overlay "K" at 39.458,10.365 h0.76; Components Courtyards "K" at 39.458,10.365 h0.76
J1: Components Courtyards "PCB Edge" at 42.5,51.091 h1 r180